# Altium PCB CET-124-120W_pnp.PcbDoc (part 2 of 2)
Units mm, origin at the board's own origin, x right, y up, seen from the top; angles counter-clockwise.
Board outline 250 x 140 mm, 2 copper layers (Top Layer, Bottom Layer); 186 components, 165 nets, 1267 pads, 0 vias.
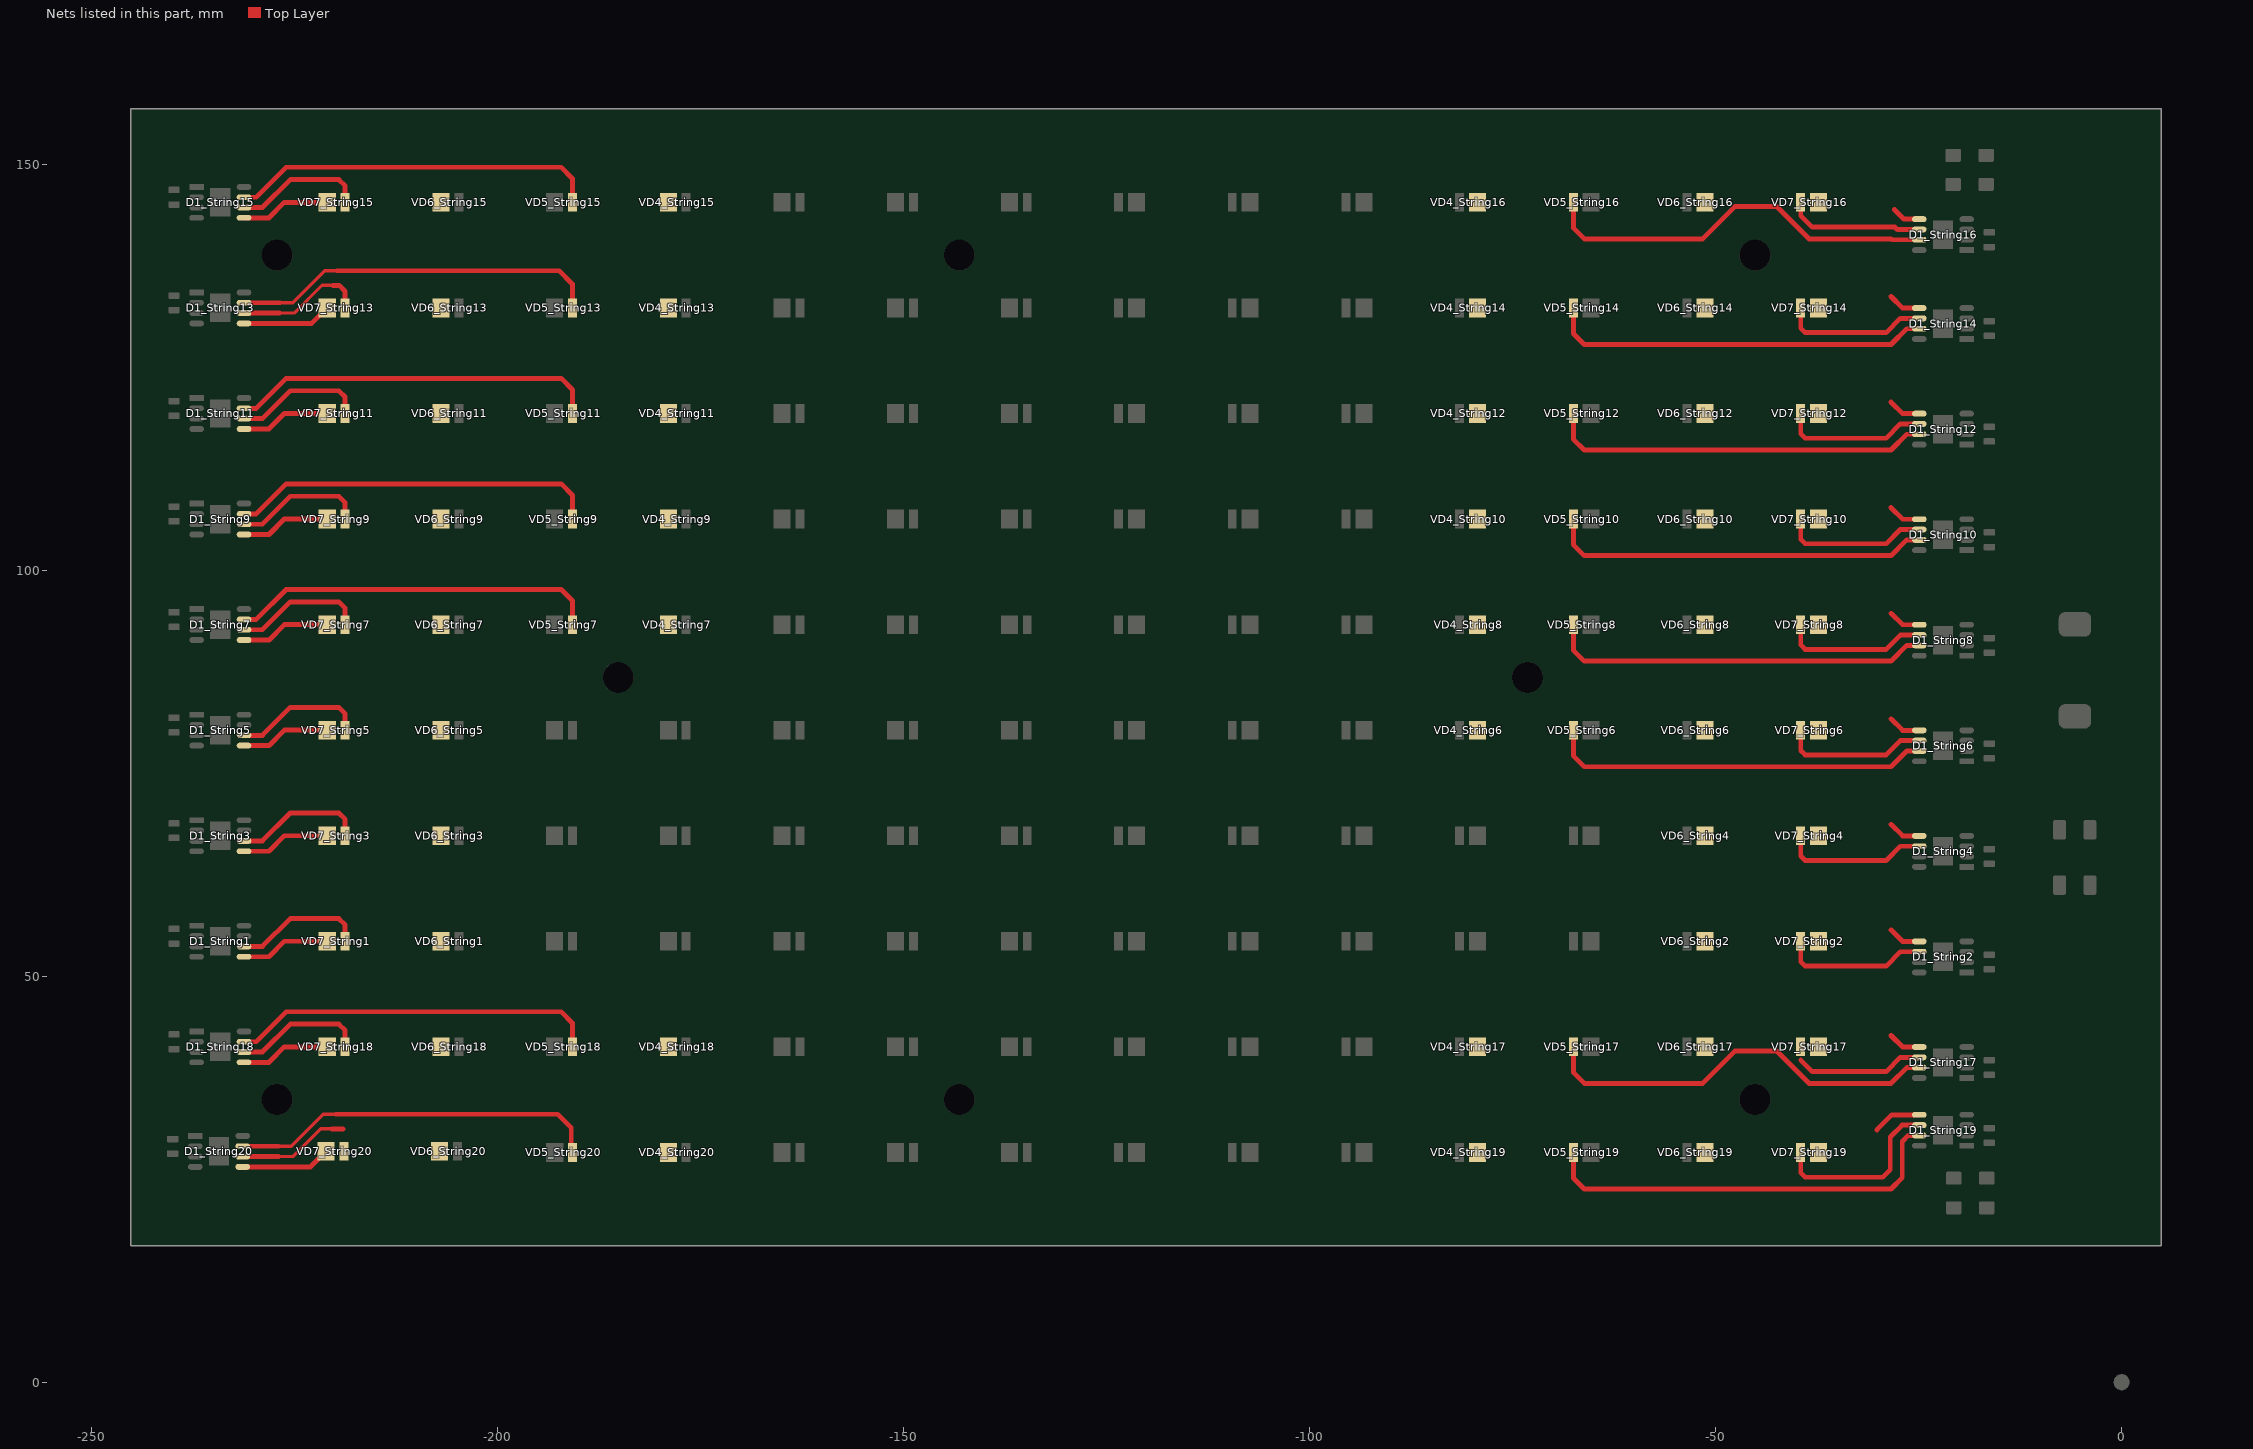
[diagram p2: the nets of this part, all layers, seen from the top]

## Nets (pads, with @x,y where several pads share a name; then routed paths per layer and width w, separated by ;. In a path a pad name is that pad's centre, name@x,y a point inside that pad or via, vN(x,y) a via of type N, cw(c..) or ccw(c..) an arc to the next point about the centre after c; other vN are vias at no path point) (continued)
S2_String6: D1_String6.7 VD4_String6.2 VD5_String6.1 | length 47.1
  Top Layer w0.6: VD5_String6.1@-67.525,80.3 -67.525,77.15 -66.175,75.8 -51.6,75.8 -28.4,75.8 ; -28.4,75.8 -26.46,77.74 D1_String6.7@-24.921,77.74
S2_String7: D1_String7.7 VD4_String7.2 VD5_String7.1 | length 45.5
  Top Layer w0.6: D1_String7.7@-231.229,93.935 -229.74,93.935 -226.05,97.625 -192.175,97.625 -190.775,96.225 VD5_String7.1@-190.775,93.3
S2_String8: D1_String8.7 VD4_String8.2 VD5_String8.1 | length 47.1
  Top Layer w0.6: VD5_String8.1@-67.525,93.3 -67.525,90.15 -66.175,88.8 -28.4,88.8 -26.46,90.74 D1_String8.7@-24.921,90.74
S2_String9: D1_String9.7 VD4_String9.2 VD5_String9.1 | length 45.5
  Top Layer w0.6: D1_String9.7@-231.229,106.935 -229.74,106.935 -226.05,110.625 -192.175,110.625 -190.775,109.225 VD5_String9.1@-190.775,106.3
S2_String10: D1_String10.7 VD4_String10.2 VD5_String10.1 | length 47.1
  Top Layer w0.6: VD5_String10.1@-67.525,106.3 -67.525,103.15 -66.175,101.8 -51.6,101.8 -28.4,101.8 -26.46,103.74 D1_String10.7@-24.921,103.74
S2_String11: D1_String11.7 VD4_String11.2 VD5_String11.1 | length 45.5
  Top Layer w0.6: D1_String11.7@-231.229,119.935 -229.74,119.935 -226.05,123.625 -192.175,123.625 -190.775,122.225 VD5_String11.1@-190.775,119.3
S2_String12: D1_String12.7 VD4_String12.2 VD5_String12.1 | length 47.1
  Top Layer w0.6: VD5_String12.1@-67.525,119.3 -67.525,116.15 -66.175,114.8 -51.6,114.8 -28.4,114.8 -26.46,116.74 D1_String12.7@-24.921,116.74
S2_String13: D1_String13.7 VD4_String13.2 VD5_String13.1 | length 45.7
  Top Layer w0.4: -226.815,132.935 -225.24,132.935 -221.3,136.875 -219.775,136.875
  Top Layer w0.6: D1_String13.7@-231.229,132.935 -226.815,132.935 ; -219.775,136.875 -192.425,136.875 -190.775,135.225 VD5_String13.1@-190.775,132.3
S2_String14: D1_String14.7 VD4_String14.2 VD5_String14.1 | length 47.1
  Top Layer w0.6: VD5_String14.1@-67.525,132.3 -67.525,129.15 -66.175,127.8 -51.6,127.8 -28.4,127.8 -26.46,129.74 D1_String14.7@-24.921,129.74
S2_String15: D1_String15.7 VD4_String15.2 VD5_String15.1 | length 45.5
  Top Layer w0.6: D1_String15.7@-231.229,145.935 -229.74,145.935 -226.05,149.625 -192.175,149.625 -190.775,148.225 VD5_String15.1@-190.775,145.3
S2_String16: D1_String16.7 VD4_String16.2 VD5_String16.1 | length 49.7
  Top Layer w0.6: VD5_String16.1@-67.525,145.3 -67.525,142.15 -66.175,140.8 -51.6,140.8 -47.6,144.8 -42.5,144.8 -38.5,140.8 -28.4,140.8 -28.29,140.69 D1_String16.7@-24.921,140.69
S2_String17: D1_String17.7 VD4_String17.2 VD5_String17.1 | length 50.4
  Top Layer w0.6: VD5_String17.1@-67.525,41.3 -67.525,38.15 -66.175,36.8 -51.6,36.8 -47.6,40.8 -42.5,40.8 -38.5,36.8 -28.4,36.8 -26.46,38.74 D1_String17.7@-24.921,38.74
S2_String18: D1_String18.7 VD4_String18.2 VD5_String18.1 | length 45.5
  Top Layer w0.6: D1_String18.7@-231.229,41.935 -229.74,41.935 -226.05,45.625 -192.175,45.625 -190.775,44.225 VD5_String18.1@-190.775,41.3
S2_String19: D1_String19.7 VD4_String19.2 VD5_String19.1 | length 51.7
  Top Layer w0.6: VD5_String19.1@-67.525,28.3 -67.525,25.15 -66.175,23.8 -28.4,23.8 -27.025,25.175 -27.025,29.65 -26.285,30.39 D1_String19.7@-24.921,30.39
S2_String20: D1_String20.7 VD4_String20.2 VD5_String20.1 | length 45.7
  Top Layer w0.4: -226.975,29.06 -225.4,29.06 -221.46,33 -219.935,33
  Top Layer w0.6: D1_String20.7@-231.389,29.06 -226.975,29.06 ; -219.935,33 -192.585,33 -190.935,31.35 VD5_String20.1@-190.935,28.425
S3_String1: D1_String1.6 VD6_String1.2 VD7_String1.1 | length 16.2
  Top Layer w0.6: D1_String1.6@-231.229,53.665 -228.96,53.665 -225.525,57.1 -219.55,57.1 -218.775,56.325 VD7_String1.1@-218.775,54.3
S3_String2: D1_String2.6 VD6_String2.2 VD7_String2.1 | length 18.1
  Top Layer w0.6: VD7_String2.1@-39.525,54.3 -39.525,51.8 -38.975,51.25 -29,51.25 -27.24,53.01 D1_String2.6@-24.921,53.01
S3_String3: D1_String3.6 VD6_String3.2 VD7_String3.1 | length 16.2
  Top Layer w0.6: D1_String3.6@-231.229,66.665 -228.96,66.665 -225.525,70.1 -219.55,70.1 -218.775,69.325 VD7_String3.1@-218.775,67.3
S3_String4: D1_String4.6 VD6_String4.2 VD7_String4.1 | length 18.1
  Top Layer w0.6: VD7_String4.1@-39.525,67.3 -39.525,64.8 -38.975,64.25 -29,64.25 -27.24,66.01 D1_String4.6@-24.921,66.01
S3_String5: D1_String5.6 VD6_String5.2 VD7_String5.1 | length 16.2
  Top Layer w0.6: D1_String5.6@-231.229,79.665 -228.96,79.665 -225.525,83.1 -219.55,83.1 -218.775,82.325 VD7_String5.1@-218.775,80.3
S3_String6: D1_String6.6 VD6_String6.2 VD7_String6.1 | length 18.1
  Top Layer w0.6: VD7_String6.1@-39.525,80.3 -39.525,77.8 -38.975,77.25 -29,77.25 -27.24,79.01 D1_String6.6@-24.921,79.01
S3_String7: D1_String7.6 VD6_String7.2 VD7_String7.1 | length 16.2
  Top Layer w0.6: D1_String7.6@-231.229,92.665 -228.96,92.665 -225.525,96.1 -219.55,96.1 -218.775,95.325 VD7_String7.1@-218.775,93.3
S3_String8: D1_String8.6 VD6_String8.2 VD7_String8.1 | length 18.1
  Top Layer w0.6: VD7_String8.1@-39.525,93.3 -39.525,90.8 -38.975,90.25 -29,90.25 ; -29,90.25 -27.24,92.01 D1_String8.6@-24.921,92.01
S3_String9: D1_String9.6 VD6_String9.2 VD7_String9.1 | length 16.2
  Top Layer w0.6: D1_String9.6@-231.229,105.665 -228.96,105.665 -225.525,109.1 -219.55,109.1 -218.775,108.325 VD7_String9.1@-218.775,106.3
S3_String10: D1_String10.6 VD6_String10.2 VD7_String10.1 | length 18.1
  Top Layer w0.6: VD7_String10.1@-39.525,106.3 -39.525,103.8 -38.975,103.25 -29,103.25 -27.24,105.01 D1_String10.6@-24.921,105.01
S3_String11: D1_String11.6 VD6_String11.2 VD7_String11.1 | length 16.2
  Top Layer w0.6: D1_String11.6@-231.229,118.665 -228.96,118.665 -225.525,122.1 -219.55,122.1 -218.775,121.325 VD7_String11.1@-218.775,119.3
S3_String12: D1_String12.6 VD6_String12.2 VD7_String12.1 | length 18.1
  Top Layer w0.6: VD7_String12.1@-39.525,119.3 -39.525,116.8 -38.975,116.25 -29,116.25 -27.24,118.01 D1_String12.6@-24.921,118.01
S3_String13: D1_String13.6 VD6_String13.2 VD7_String13.1 | length 16.2
  Top Layer w0.4: -226.835,131.665 -225.06,131.665 -221.625,135.1 -220.275,135.1 -220.25,135.075
  Top Layer w0.6: D1_String13.6@-231.229,131.665 -226.835,131.665 ; -220.25,135.075 -219.525,135.075 -218.775,134.325 VD7_String13.1@-218.775,132.3
S3_String14: D1_String14.6 VD6_String14.2 VD7_String14.1 | length 18.1
  Top Layer w0.6: VD7_String14.1@-39.525,132.3 -39.525,129.8 -38.975,129.25 -29,129.25 -27.24,131.01 D1_String14.6@-24.921,131.01
S3_String15: D1_String15.6 VD6_String15.2 VD7_String15.1 | length 16.2
  Top Layer w0.6: D1_String15.6@-231.229,144.665 -228.96,144.665 -225.525,148.1 -219.55,148.1 -218.775,147.325 VD7_String15.1@-218.775,145.3
S3_String16: D1_String16.6 VD6_String16.2 VD7_String16.1 | length 16.9
  Top Layer w0.6: VD7_String16.1@-39.525,145.3 -39.525,143.675 -38.1,142.25 -27.925,142.25 -27.635,141.96 D1_String16.6@-24.921,141.96
S3_String17: D1_String17.6 VD6_String17.2 VD7_String17.1 | length 15.9
  Top Layer w0.6: -39.525,39.675 -38.1,38.25 -29,38.25 -27.24,40.01 D1_String17.6@-24.921,40.01
S3_String18: D1_String18.6 VD6_String18.2 VD7_String18.1 | length 16.2
  Top Layer w0.6: D1_String18.6@-231.229,40.665 -228.96,40.665 -225.525,44.1 -219.55,44.1 -218.775,43.325 VD7_String18.1@-218.775,41.3
S3_String19: D1_String19.6 VD6_String19.2 VD7_String19.1 | length 22.3
  Top Layer w0.6: VD7_String19.1@-39.525,28.3 -39.525,25.8 -38.975,25.25 -29.425,25.25 -28.5,26.175 -28.5,30.2 -27.04,31.66 D1_String19.6@-24.921,31.66
S3_String20: D1_String20.6 VD6_String20.2 VD7_String20.1 | length 13.8
  Top Layer w0.4: -226.995,27.79 -225.22,27.79 -221.785,31.225 -220.435,31.225 -220.41,31.2
  Top Layer w0.6: D1_String20.6@-231.389,27.79 -226.995,27.79 ; -220.41,31.2 -219,31.2
S4_String1: D1_String1.5 VD7_String1.2 | length 11
  Top Layer w0.6: D1_String1.5@-231.229,52.395 -228.155,52.395 -226.25,54.3 VD7_String1.2@-220.975,54.3
S4_String2: D1_String2.5 VD7_String2.2 | length 4.1
  Top Layer w0.6: -28.4,55.7 -26.98,54.28 D1_String2.5@-24.921,54.28
S4_String3: D1_String3.5 VD7_String3.2 | length 11
  Top Layer w0.6: D1_String3.5@-231.229,65.395 -228.155,65.395 -226.25,67.3 VD7_String3.2@-220.975,67.3
S4_String4: D1_String4.5 VD7_String4.2 | length 4.1
  Top Layer w0.6: -28.4,68.7 -26.98,67.28 D1_String4.5@-24.921,67.28
S4_String5: D1_String5.5 VD7_String5.2 | length 11
  Top Layer w0.6: D1_String5.5@-231.229,78.395 -228.155,78.395 -226.25,80.3 VD7_String5.2@-220.975,80.3
S4_String6: D1_String6.5 VD7_String6.2 | length 4.1
  Top Layer w0.6: -28.4,81.7 -26.98,80.28 D1_String6.5@-24.921,80.28
S4_String7: D1_String7.5 VD7_String7.2 | length 11
  Top Layer w0.6: D1_String7.5@-231.229,91.395 -228.155,91.395 -226.25,93.3 VD7_String7.2@-220.975,93.3
S4_String8: D1_String8.5 VD7_String8.2 | length 4.1
  Top Layer w0.6: -28.4,94.7 -26.98,93.28 D1_String8.5@-24.921,93.28
S4_String9: D1_String9.5 VD7_String9.2 | length 11
  Top Layer w0.6: D1_String9.5@-231.229,104.395 -228.155,104.395 -226.25,106.3 VD7_String9.2@-220.975,106.3
S4_String10: D1_String10.5 VD7_String10.2 | length 4.1
  Top Layer w0.6: -28.4,107.7 -26.98,106.28 D1_String10.5@-24.921,106.28
S4_String11: D1_String11.5 VD7_String11.2 | length 11
  Top Layer w0.6: D1_String11.5@-231.229,117.395 -228.155,117.395 -226.25,119.3 VD7_String11.2@-220.975,119.3
S4_String12: D1_String12.5 VD7_String12.2 | length 4.1
  Top Layer w0.6: -28.4,120.7 -26.98,119.28 D1_String12.5@-24.921,119.28
S4_String13: D1_String13.5 VD7_String13.2 | length 11
  Top Layer w0.6: D1_String13.5@-231.229,130.395 -222.88,130.395 VD7_String13.2@-220.975,132.3
S4_String14: D1_String14.5 VD7_String14.2 | length 4.1
  Top Layer w0.6: -28.4,133.7 -26.98,132.28 D1_String14.5@-24.921,132.28
S4_String15: D1_String15.5 VD7_String15.2 | length 11
  Top Layer w0.6: D1_String15.5@-231.229,143.395 -228.155,143.395 -226.25,145.3 VD7_String15.2@-220.975,145.3
S4_String16: D1_String16.5 VD7_String16.2 | length 3.5
  Top Layer w0.6: -27.975,144.4 -26.805,143.23 D1_String16.5@-24.921,143.23
S4_String17: D1_String17.5 VD7_String17.2 | length 4.1
  Top Layer w0.6: -28.4,42.7 -26.98,41.28 D1_String17.5@-24.921,41.28
S4_String18: D1_String18.5 VD7_String18.2 | length 11
  Top Layer w0.6: D1_String18.5@-231.229,39.395 -228.155,39.395 -226.25,41.3 VD7_String18.2@-220.975,41.3
S4_String19: D1_String19.5 VD7_String19.2 | length 6
  Top Layer w0.6: -30.15,31.075 -28.295,32.93 D1_String19.5@-24.921,32.93
S4_String20: D1_String20.5 VD7_String20.2 | length 11
  Top Layer w0.6: D1_String20.5@-231.389,26.52 -223.04,26.52 VD7_String20.2@-221.135,28.425
pads on no net: D1_String1.2 D1_String1.4 D1_String2.2 D1_String2.4 D1_String3.2 D1_String3.4 D1_String4.2 D1_String4.4 D1_String5.2 D1_String5.4 D1_String6.2 D1_String6.4 D1_String7.2 D1_String7.4 D1_String8.2 D1_String8.4 D1_String9.2 D1_String9.4 D1_String10.2 D1_String10.4 D1_String11.2 D1_String11.4 D1_String12.2 D1_String12.4 D1_String13.2 D1_String13.4 D1_String14.2 D1_String14.4 D1_String15.2 D1_String15.4 D1_String16.2 D1_String16.4 D1_String17.2 D1_String17.4 D1_String18.2 D1_String18.4 D1_String19.2 D1_String19.4 D1_String20.2 D1_String20.4 VD1_String1.0 VD1_String2.0 VD1_String3.0 VD1_String4.0 VD1_String5.0 VD1_String6.0 VD1_String7.0 VD1_String8.0 VD1_String9.0 VD1_String10.0 VD1_String11.0 VD1_String12.0 VD1_String13.0 VD1_String14.0 VD1_String15.0 VD1_String16.0 VD1_String17.0 VD1_String18.0 VD1_String19.0 VD1_String20.0 VD2_String1.0 VD2_String2.0 VD2_String3.0 VD2_String4.0 VD2_String5.0 VD2_String6.0 VD2_String7.0 VD2_String8.0 VD2_String9.0 VD2_String10.0 VD2_String11.0 VD2_String12.0 VD2_String13.0 VD2_String14.0 VD2_String15.0 VD2_String16.0 VD2_String17.0 VD2_String18.0 VD2_String19.0 VD2_String20.0 VD3_String1.0 VD3_String2.0 VD3_String3.0 VD3_String4.0 VD3_String5.0 VD3_String6.0 VD3_String7.0 VD3_String8.0 VD3_String9.0 VD3_String10.0 VD3_String11.0 VD3_String12.0 VD3_String13.0 VD3_String14.0 VD3_String15.0 VD3_String16.0 VD3_String17.0 VD3_String18.0 VD3_String19.0 VD3_String20.0 VD4_String1.0 VD4_String2.0 VD4_String3.0 VD4_String4.0 VD4_String5.0 VD4_String6.0 VD4_String7.0 VD4_String8.0 VD4_String9.0 VD4_String10.0 VD4_String11.0 VD4_String12.0 VD4_String13.0 VD4_String14.0 VD4_String15.0 VD4_String16.0 VD4_String17.0 VD4_String18.0 VD4_String19.0 VD4_String20.0 VD5_String1.0 VD5_String2.0 VD5_String3.0 VD5_String4.0 VD5_String5.0 VD5_String6.0 VD5_String7.0 VD5_String8.0 VD5_String9.0 VD5_String10.0 VD5_String11.0 VD5_String12.0 VD5_String13.0 VD5_String14.0 VD5_String15.0 VD5_String16.0 VD5_String17.0 VD5_String18.0 VD5_String19.0 VD5_String20.0 VD6_String1.0 VD6_String2.0 VD6_String3.0 VD6_String4.0 VD6_String5.0 VD6_String6.0 VD6_String7.0 VD6_String8.0 VD6_String9.0 VD6_String10.0 VD6_String11.0 VD6_String12.0 VD6_String13.0 VD6_String14.0 VD6_String15.0 VD6_String16.0 VD6_String17.0 VD6_String18.0 VD6_String19.0 VD6_String20.0 VD7_String1.0 VD7_String2.0 VD7_String3.0 VD7_String4.0 VD7_String5.0 VD7_String6.0 VD7_String7.0 VD7_String8.0 VD7_String9.0 VD7_String10.0 VD7_String11.0 VD7_String12.0 VD7_String13.0 VD7_String14.0 VD7_String15.0 VD7_String16.0 VD7_String17.0 VD7_String18.0 VD7_String19.0 VD7_String20.0
copper on no net: | length 76.6
  Top Layer w0.5: -251.175,16.8 -241.6,16.8 ; -251.175,156.8 -241.6,156.8 ; -245.15,10.775 -245.15,20.35 ; -245.15,153.25 -245.15,162.825 ; 1.3,16.8 10.875,16.8 ; 1.3,156.8 10.875,156.8 ; 4.85,10.775 4.85,20.35 ; 4.85,153.25 4.85,162.825

## Other copper
Top Layer:
  region: -4.325,133.4 -6.85,133.4 -6.85,100.6 -4.325,100.6
  region net LED+: -20.325,154.275 -22.725,154.275 -22.725,146.7 -20.325,146.7
  region net S4_String16: -38.375,143.9 -37.87,143.395 -27.35,143.395 -27.35,148.45 -27.6,148.7 -37.4,148.7 -38.375,147.725
  region net S3_String16: -39.15,143.675 -39.525,143.675 -39.525,143.475 -39.5,143.45 -39.555,143.395 -39.65,143.395 -42.205,145.95 -48.1,145.95 -50.925,143.125 -52.15,143.125 -52.375,143.35 -52.375,150.05 -51.8,150.625 -39.45,150.625 -39.15,150.325
  region net NetVD5_String16_2: -53.325,142.25 -53.65,141.925 -65.575,141.925 -66.375,142.725 -66.375,150.175 -65.925,150.625 -53.9,150.625 -53.325,150.05
  region net S2_String16: -67.325,142.25 -67.65,141.925 -79.575,141.925 -80.375,142.725 -80.375,150.175 -79.925,150.625 -67.9,150.625 -67.325,150.05
  region net NetVD3_String16_2: -81.325,142.25 -81.65,141.925 -93.575,141.925 -94.375,142.725 -94.375,150.175 -93.925,150.625 -81.9,150.625 -81.325,150.05
  region net S1_String16: -95.325,142.25 -95.65,141.925 -107.575,141.925 -108.375,142.725 -108.375,150.175 -107.925,150.625 -95.9,150.625 -95.325,150.05
  region net NetVD1_String16_2: -109.325,142.25 -109.65,141.925 -121.575,141.925 -122.375,142.725 -122.375,150.175 -121.925,150.625 -109.9,150.625 -109.325,150.05
  region net NetVD1_String14_2: -109.325,129.25 -109.65,128.925 -121.575,128.925 -122.375,129.725 -122.375,137.175 -121.575,137.975 -110.25,137.975 -109.325,137.05
  region net S1_String14: -95.325,129.25 -95.65,128.925 -107.575,128.925 -108.375,129.725 -108.375,137.175 -107.575,137.975 -96.25,137.975 -95.325,137.05
  region net NetVD3_String14_2: -81.325,129.25 -81.65,128.925 -93.575,128.925 -94.375,129.725 -94.375,137.175 -93.575,137.975 -82.25,137.975 -81.325,137.05
  region net S2_String14: -67.325,129.25 -67.65,128.925 -79.575,128.925 -80.375,129.725 -80.375,137.175 -79.575,137.975 -68.25,137.975 -67.325,137.05
  region net NetVD5_String14_2: -53.325,129.25 -53.65,128.925 -65.575,128.925 -66.375,129.725 -66.375,137.175 -65.575,137.975 -54.25,137.975 -53.325,137.05
  region net S4_String14: -38.375,130.9 -37.87,130.395 -30.005,130.395 -27.35,133.05 -27.35,135.45 -27.6,135.7 -37.4,135.7 -38.375,134.725
  region net S3_String14: -39.15,129.425 -51.275,129.425 -52.375,130.525 -52.375,134.9 -50.975,136.3 -49.471,136.3 -48.375,135.575 -46.675,134.45 -43.775,134.45 -42.45,135.175 -41.325,136.3 -40.8,136.3 -39.15,134.65
  region net NetVD1_String13_2: -136.75,126.625 -148.35,126.625 -149.15,127.425 -149.15,135.075 -147.925,136.3 -147.256,136.3 -146.031,135.075 -144.46,134.45 -141.422,134.45 -140.103,135.172 -138.975,136.3 -136.7,136.3 -135.925,135.525 -135.925,127.45
  region net S1_String13: -163.125,135.2 -162.65,135.675 -150.725,135.675 -149.925,134.875 -149.925,127.425 -150.725,126.625 -162.05,126.625 -163.125,127.7
  region net NetVD3_String13_2: -176.975,135.35 -176.65,135.675 -164.725,135.675 -163.925,134.875 -163.925,127.425 -164.725,126.625 -176.05,126.625 -176.975,127.55
  region net S2_String13: -191.15,135.45 -190.925,135.675 -178.725,135.675 -177.925,134.875 -177.925,127.425 -178.725,126.625 -190.05,126.625 -191.15,127.725
  region net NetVD5_String13_2: -205.125,135.2 -204.65,135.675 -192.725,135.675 -191.925,134.875 -191.925,127.425 -192.725,126.625 -204.05,126.625 -205.125,127.7
  region net S3_String13: -219.125,134.95 -218.4,135.675 -206.725,135.675 -205.925,134.875 -205.925,127.425 -206.725,126.625 -218.05,126.625 -219.125,127.7
  region net S3_String15: -219.125,147.95 -218.4,148.675 -206.725,148.675 -205.925,147.875 -205.925,140.425 -206.725,139.625 -218.05,139.625 -219.125,140.7
  region net NetVD5_String15_2: -205.125,148.2 -204.65,148.675 -192.725,148.675 -191.925,147.875 -191.925,140.425 -192.725,139.625 -204.05,139.625 -205.125,140.7
  region net S2_String15: -191.15,148.45 -190.925,148.675 -178.725,148.675 -177.925,147.875 -177.925,140.425 -178.725,139.625 -190.05,139.625 -191.15,140.725
  region net NetVD3_String15_2: -176.975,148.35 -176.65,148.675 -164.725,148.675 -163.925,147.875 -163.925,140.425 -164.725,139.625 -176.05,139.625 -176.975,140.55
  region net S1_String15: -163.125,148.2 -162.65,148.675 -150.725,148.675 -149.925,147.875 -149.925,140.425 -150.725,139.625 -162.05,139.625 -163.125,140.7
  region net NetVD1_String15_2: -136.75,150.975 -148.35,150.975 -149.15,150.175 -149.15,142.525 -147.925,141.3 -147.256,141.3 -146.031,142.525 -144.46,143.15 -141.422,143.15 -140.103,142.428 -138.975,141.3 -136.7,141.3 -135.925,142.075 -135.925,150.15
  region net S4_String15: -219.925,140.6 -220.9,139.625 -222.425,139.625 -222.975,140.175 -222.975,141.15 -224.925,143.1 -228.6,143.1 -228.6,143.35 -224.975,146.975 -220.125,146.975 -219.925,146.775
  region net S4_String13: -219.925,127.662 -220.962,126.625 -229.025,126.625 -229.975,127.575 -229.975,130.325 -229.8,130.5 -225.15,130.5 -221.725,133.925 -220.15,133.925 -219.925,133.7
  region net S4_String11: -219.925,114.662 -220.962,113.625 -229.025,113.625 -229.975,114.575 -229.975,117.325 -229.8,117.5 -228.475,117.5 -225.05,120.925 -220.15,120.925 -219.925,120.7
  region net S3_String11: -219.125,121.95 -218.4,122.675 -206.725,122.675 -205.925,121.875 -205.925,114.425 -206.725,113.625 -218.05,113.625 -219.125,114.7
  region net NetVD5_String11_2: -205.125,122.2 -204.65,122.675 -192.725,122.675 -191.925,121.875 -191.925,114.425 -192.725,113.625 -204.05,113.625 -205.125,114.7
  region net S2_String11: -191.15,122.45 -190.925,122.675 -178.725,122.675 -177.925,121.875 -177.925,114.425 -178.725,113.625 -190.05,113.625 -191.15,114.725
  region net NetVD3_String11_2: -176.975,122.35 -176.65,122.675 -164.725,122.675 -163.925,121.875 -163.925,114.425 -164.725,113.625 -176.05,113.625 -176.975,114.55
  region net S1_String11: -163.125,122.2 -162.65,122.675 -150.725,122.675 -149.925,121.875 -149.925,114.425 -150.725,113.625 -162.05,113.625 -163.125,114.7
  region net S4_String9: -219.925,101.662 -220.962,100.625 -229.025,100.625 -229.975,101.575 -229.975,104.325 -229.8,104.5 -228.45,104.5 -225.025,107.925 -220.15,107.925 -219.925,107.7
  region net S3_String9: -219.125,108.95 -218.4,109.675 -206.725,109.675 -205.925,108.875 -205.925,101.425 -206.725,100.625 -218.05,100.625 -219.125,101.7
  region net NetVD5_String9_2: -205.125,109.2 -204.65,109.675 -192.725,109.675 -191.925,108.875 -191.925,101.425 -192.725,100.625 -204.05,100.625 -205.125,101.7
  region net S2_String9: -191.15,109.45 -190.925,109.675 -178.725,109.675 -177.925,108.875 -177.925,101.425 -178.725,100.625 -190.05,100.625 -191.15,101.725
  region net NetVD3_String9_2: -176.975,109.35 -176.65,109.675 -164.725,109.675 -163.925,108.875 -163.925,101.425 -164.725,100.625 -176.05,100.625 -176.975,101.55
  region net S1_String9: -163.125,109.2 -162.65,109.675 -150.725,109.675 -149.925,108.875 -149.925,101.425 -150.725,100.625 -162.05,100.625 -163.125,101.7
  region net S4_String7: -219.925,88.662 -220.962,87.625 -229.025,87.625 -229.975,88.575 -229.975,91.325 -229.8,91.5 -228.45,91.5 -225.025,94.925 -220.15,94.925 -219.925,94.7
  region net S3_String7: -219.125,95.95 -218.4,96.675 -206.725,96.675 -205.925,95.875 -205.925,88.425 -206.725,87.625 -218.05,87.625 -219.125,88.7
  region net NetVD5_String7_2: -205.125,96.2 -204.65,96.675 -192.725,96.675 -191.925,95.875 -191.925,88.425 -192.725,87.625 -204.05,87.625 -205.125,88.7
  region net NetVD3_String7_2: -176.975,96.35 -176.65,96.675 -164.725,96.675 -163.925,95.875 -163.925,88.425 -164.725,87.625 -176.05,87.625 -176.975,88.55
  region net S1_String7: -163.125,96.2 -162.65,96.675 -150.725,96.675 -149.925,95.875 -149.925,88.425 -150.725,87.625 -162.05,87.625 -163.125,88.7
  region net S4_String5: -219.925,75.662 -220.962,74.625 -229.025,74.625 -229.975,75.575 -229.975,78.325 -229.8,78.5 -228.45,78.5 -225.025,81.925 -220.15,81.925 -219.925,81.7
  region net S3_String5: -219.125,82.95 -218.4,83.675 -206.725,83.675 -205.925,82.875 -205.925,75.425 -206.725,74.625 -218.05,74.625 -219.125,75.7
  region net NetVD5_String5_2: -205.125,83.2 -204.65,83.675 -192.725,83.675 -191.925,82.875 -191.925,75.425 -192.725,74.625 -204.05,74.625 -205.125,75.7
  region net NetVD3_String5_2: -176.975,83.35 -176.65,83.675 -164.725,83.675 -163.925,82.875 -163.925,75.425 -164.725,74.625 -176.05,74.625 -176.975,75.55
  region net S1_String5: -163.125,83.2 -162.65,83.675 -150.725,83.675 -149.925,82.875 -149.925,75.425 -150.725,74.625 -162.05,74.625 -163.125,75.7
  region net S4_String3: -219.925,62.662 -220.962,61.625 -229.025,61.625 -229.975,62.575 -229.975,65.325 -229.8,65.5 -228.45,65.5 -225.025,68.925 -220.15,68.925 -219.925,68.7
  region net S3_String3: -219.125,69.95 -218.4,70.675 -206.725,70.675 -205.925,69.875 -205.925,62.425 -206.725,61.625 -218.05,61.625 -219.125,62.7
  region net NetVD5_String3_2: -205.125,70.2 -204.65,70.675 -192.725,70.675 -191.925,69.875 -191.925,62.425 -192.725,61.625 -204.05,61.625 -205.125,62.7
  region net S2_String3: -191.15,70.45 -190.925,70.675 -178.725,70.675 -177.925,69.875 -177.925,62.425 -178.725,61.625 -190.05,61.625 -191.15,62.725
  region net NetVD3_String3_2: -176.975,70.35 -176.65,70.675 -164.725,70.675 -163.925,69.875 -163.925,62.425 -164.725,61.625 -176.05,61.625 -176.975,62.55
  region net S1_String3: -163.125,70.2 -162.65,70.675 -150.725,70.675 -149.925,69.875 -149.925,62.425 -150.725,61.625 -162.05,61.625 -163.125,62.7
  region net S4_String1: -219.925,49.662 -220.962,48.625 -229.025,48.625 -229.975,49.575 -229.975,52.325 -229.8,52.5 -228.475,52.5 -225.05,55.925 -220.15,55.925 -219.925,55.7
  region net S3_String1: -219.125,56.95 -218.4,57.675 -206.725,57.675 -205.925,56.875 -205.925,49.425 -206.725,48.625 -218.05,48.625 -219.125,49.7
  region net NetVD5_String1_2: -205.125,57.2 -204.65,57.675 -192.725,57.675 -191.925,56.875 -191.925,49.425 -192.725,48.625 -204.05,48.625 -205.125,49.7
  region net S2_String1: -191.15,57.45 -190.925,57.675 -178.725,57.675 -177.925,56.875 -177.925,49.425 -178.725,48.625 -190.05,48.625 -191.15,49.725
  region net NetVD3_String1_2: -176.975,57.35 -176.65,57.675 -164.725,57.675 -163.925,56.875 -163.925,49.425 -164.725,48.625 -176.05,48.625 -176.975,49.55
  region net S1_String1: -163.125,57.2 -162.65,57.675 -150.725,57.675 -149.925,56.875 -149.925,49.425 -150.725,48.625 -162.05,48.625 -163.125,49.7
  region net S3_String18: -219.125,43.95 -218.4,44.675 -206.725,44.675 -205.925,43.875 -205.925,36.425 -206.725,35.625 -218.05,35.625 -219.125,36.7
  region net NetVD5_String18_2: -205.125,44.2 -204.65,44.675 -192.725,44.675 -191.925,43.875 -191.925,36.425 -192.725,35.625 -204.05,35.625 -205.125,36.7
  region net S2_String18: -191.15,44.45 -190.925,44.675 -178.725,44.675 -177.925,43.875 -177.925,36.425 -178.725,35.625 -190.05,35.625 -191.15,36.725
  region net NetVD3_String18_2: -176.975,44.35 -176.65,44.675 -164.725,44.675 -163.925,43.875 -163.925,36.425 -164.725,35.625 -176.05,35.625 -176.975,36.55
  region net S1_String18: -163.125,44.2 -162.65,44.675 -150.725,44.675 -149.925,43.875 -149.925,36.425 -150.725,35.625 -162.05,35.625 -163.125,36.7
  region net S4_String20: -220.085,23.787 -221.122,22.75 -229.185,22.75 -230.135,23.7 -230.135,26.45 -229.96,26.625 -225.31,26.625 -221.885,30.05 -220.31,30.05 -220.085,29.825
  region net S3_String20: -219.285,31.44 -218.925,31.8 -206.885,31.8 -206.085,31 -206.085,23.55 -206.885,22.75 -218.21,22.75 -219.285,23.825
  region net NetVD5_String20_2: -205.285,31.325 -204.81,31.8 -192.885,31.8 -192.085,31 -192.085,23.55 -192.885,22.75 -204.21,22.75 -205.285,23.825
  region net S2_String20: -191.31,31.575 -191.085,31.8 -178.885,31.8 -178.085,31 -178.085,23.55 -178.885,22.75 -190.21,22.75 -191.31,23.85
  region net NetVD3_String20_2: -177.135,31.475 -176.81,31.8 -164.885,31.8 -164.085,31 -164.085,23.55 -164.885,22.75 -176.21,22.75 -177.135,23.675
  region net S1_String20: -163.285,31.325 -162.81,31.8 -150.885,31.8 -150.085,31 -150.085,23.55 -150.885,22.75 -162.21,22.75 -163.285,23.825
  region net S2_String7: -179.075,98.025 -190.05,98.025 -191.15,96.925 -191.15,90.525 -189.925,89.3 -189.256,89.3 -188.031,90.525 -186.46,91.15 -183.422,91.15 -182.103,90.428 -180.975,89.3 -178.7,89.3 -177.925,90.075 -177.925,96.875
  region net S2_String5: -178.75,74.625 -190.35,74.625 -191.15,75.425 -191.15,83.6 -190.725,83.6 -187.875,80.75 -182.125,80.75 -179.55,83.325 -177.925,83.325 -177.925,75.45
  region net S4_String18: -219.925,36.6 -220.9,35.625 -222.425,35.625 -222.975,36.175 -222.975,37.15 -224.925,39.1 -228.6,39.1 -228.6,39.35 -224.975,42.975 -220.125,42.975 -219.925,42.775
  region net NetVD1_String11_2: -149.125,122.2 -148.65,122.675 -136.725,122.675 -135.925,121.875 -135.925,114.425 -136.725,113.625 -148.05,113.625 -149.125,114.7
  region net NetVD1_String9_2: -149.125,109.2 -148.65,109.675 -136.725,109.675 -135.925,108.875 -135.925,101.425 -136.725,100.625 -148.05,100.625 -149.125,101.7
  region net NetVD1_String7_2: -149.125,96.2 -148.65,96.675 -136.725,96.675 -135.925,95.875 -135.925,88.425 -136.725,87.625 -148.05,87.625 -149.125,88.7
  region net NetVD1_String5_2: -149.125,83.2 -148.65,83.675 -136.725,83.675 -135.925,82.875 -135.925,75.425 -136.725,74.625 -148.05,74.625 -149.125,75.7
  region net NetVD1_String3_2: -149.125,70.2 -148.65,70.675 -136.725,70.675 -135.925,69.875 -135.925,62.425 -136.725,61.625 -148.05,61.625 -149.125,62.7
  region net NetVD1_String1_2: -149.125,57.2 -148.65,57.675 -136.725,57.675 -135.925,56.875 -135.925,49.425 -136.725,48.625 -148.05,48.625 -149.125,49.7
  region net NetVD1_String18_2: -136.75,46.975 -148.35,46.975 -149.15,46.175 -149.15,38.525 -147.925,37.3 -147.256,37.3 -146.031,38.525 -144.46,39.15 -141.422,39.15 -140.103,38.428 -138.975,37.3 -136.7,37.3 -135.925,38.075 -135.925,46.15
  region net NetVD1_String20_2: -136.75,22.625 -148.35,22.625 -149.15,23.425 -149.15,31.075 -147.925,32.3 -147.256,32.3 -146.031,31.075 -144.46,30.45 -141.422,30.45 -140.103,31.172 -138.975,32.3 -136.7,32.3 -135.925,31.525 -135.925,23.45
  region net NetVD5_String12_2: -53.325,116.25 -53.65,115.925 -65.575,115.925 -66.375,116.725 -66.375,124.175 -65.575,124.975 -54.25,124.975 -53.325,124.05
  region net S2_String12: -67.325,116.25 -67.65,115.925 -79.575,115.925 -80.375,116.725 -80.375,124.175 -79.575,124.975 -68.25,124.975 -67.325,124.05
  region net NetVD3_String12_2: -81.325,116.25 -81.65,115.925 -93.575,115.925 -94.375,116.725 -94.375,124.175 -93.575,124.975 -82.25,124.975 -81.325,124.05
  region net S1_String12: -95.325,116.25 -95.65,115.925 -107.575,115.925 -108.375,116.725 -108.375,124.175 -107.575,124.975 -96.25,124.975 -95.325,124.05
  region net NetVD1_String12_2: -109.325,116.25 -109.65,115.925 -121.575,115.925 -122.375,116.725 -122.375,124.175 -121.575,124.975 -110.25,124.975 -109.325,124.05
  region net NetVD5_String10_2: -53.325,103.25 -53.65,102.925 -65.575,102.925 -66.375,103.725 -66.375,111.175 -65.575,111.975 -54.25,111.975 -53.325,111.05
  region net S2_String10: -67.325,103.25 -67.65,102.925 -79.575,102.925 -80.375,103.725 -80.375,111.175 -79.575,111.975 -68.25,111.975 -67.325,111.05
  region net NetVD3_String10_2: -81.325,103.25 -81.65,102.925 -93.575,102.925 -94.375,103.725 -94.375,111.175 -93.575,111.975 -82.25,111.975 -81.325,111.05
  region net S1_String10: -95.325,103.25 -95.65,102.925 -107.575,102.925 -108.375,103.725 -108.375,111.175 -107.575,111.975 -96.25,111.975 -95.325,111.05
  region net NetVD1_String10_2: -109.325,103.25 -109.65,102.925 -121.575,102.925 -122.375,103.725 -122.375,111.175 -121.575,111.975 -110.25,111.975 -109.325,111.05
  region net NetVD5_String8_2: -53.325,90.25 -53.65,89.925 -65.575,89.925 -66.375,90.725 -66.375,98.175 -65.575,98.975 -54.25,98.975 -53.325,98.05
  region net NetVD3_String8_2: -81.325,90.25 -81.65,89.925 -93.575,89.925 -94.375,90.725 -94.375,98.175 -93.575,98.975 -82.25,98.975 -81.325,98.05
  region net S1_String8: -95.325,90.25 -95.65,89.925 -107.575,89.925 -108.375,90.725 -108.375,98.175 -107.575,98.975 -96.25,98.975 -95.325,98.05
  region net NetVD1_String8_2: -109.325,90.25 -109.65,89.925 -121.575,89.925 -122.375,90.725 -122.375,98.175 -121.575,98.975 -110.25,98.975 -109.325,98.05
  region net NetVD5_String6_2: -53.325,77.25 -53.65,76.925 -65.575,76.925 -66.375,77.725 -66.375,85.175 -65.575,85.975 -54.25,85.975 -53.325,85.05
  region net NetVD3_String6_2: -81.325,77.25 -81.65,76.925 -93.575,76.925 -94.375,77.725 -94.375,85.175 -93.575,85.975 -82.25,85.975 -81.325,85.05
  region net S1_String6: -95.325,77.25 -95.65,76.925 -107.575,76.925 -108.375,77.725 -108.375,85.175 -107.575,85.975 -96.25,85.975 -95.325,85.05
  region net NetVD1_String6_2: -109.325,77.25 -109.65,76.925 -121.575,76.925 -122.375,77.725 -122.375,85.175 -121.575,85.975 -110.25,85.975 -109.325,85.05
  region net NetVD5_String4_2: -53.325,64.25 -53.65,63.925 -65.575,63.925 -66.375,64.725 -66.375,72.175 -65.575,72.975 -54.25,72.975 -53.325,72.05
  region net S2_String4: -67.325,64.25 -67.65,63.925 -79.575,63.925 -80.375,64.725 -80.375,72.175 -79.575,72.975 -68.25,72.975 -67.325,72.05
  region net NetVD3_String4_2: -81.325,64.25 -81.65,63.925 -93.575,63.925 -94.375,64.725 -94.375,72.175 -93.575,72.975 -82.25,72.975 -81.325,72.05
  region net S1_String4: -95.325,64.25 -95.65,63.925 -107.575,63.925 -108.375,64.725 -108.375,72.175 -107.575,72.975 -96.25,72.975 -95.325,72.05
  region net NetVD1_String4_2: -109.325,64.25 -109.65,63.925 -121.575,63.925 -122.375,64.725 -122.375,72.175 -121.575,72.975 -110.25,72.975 -109.325,72.05
  region net NetVD5_String2_2: -53.325,51.25 -53.65,50.925 -65.575,50.925 -66.375,51.725 -66.375,59.175 -65.575,59.975 -54.25,59.975 -53.325,59.05
  region net S2_String2: -67.325,51.25 -67.65,50.925 -79.575,50.925 -80.375,51.725 -80.375,59.175 -79.575,59.975 -68.25,59.975 -67.325,59.05
  region net NetVD3_String2_2: -81.325,51.25 -81.65,50.925 -93.575,50.925 -94.375,51.725 -94.375,59.175 -93.575,59.975 -82.25,59.975 -81.325,59.05
  region net S1_String2: -95.325,51.25 -95.65,50.925 -107.575,50.925 -108.375,51.725 -108.375,59.175 -107.575,59.975 -96.25,59.975 -95.325,59.05
  region net NetVD1_String2_2: -109.325,51.25 -109.65,50.925 -121.575,50.925 -122.375,51.725 -122.375,59.175 -121.575,59.975 -110.25,59.975 -109.325,59.05
  region net NetVD5_String17_2: -53.325,38.25 -53.65,37.925 -65.575,37.925 -66.375,38.725 -66.375,46.175 -65.575,46.975 -54.25,46.975 -53.325,46.05
  region net S2_String17: -67.325,38.25 -67.65,37.925 -79.575,37.925 -80.375,38.725 -80.375,46.175 -79.575,46.975 -68.25,46.975 -67.325,46.05
  region net NetVD3_String17_2: -81.325,38.25 -81.65,37.925 -93.575,37.925 -94.375,38.725 -94.375,46.175 -93.575,46.975 -82.25,46.975 -81.325,46.05
  region net S1_String17: -95.325,38.25 -95.65,37.925 -107.575,37.925 -108.375,38.725 -108.375,46.175 -107.575,46.975 -96.25,46.975 -95.325,46.05
  region net NetVD1_String17_2: -109.325,38.25 -109.65,37.925 -121.575,37.925 -122.375,38.725 -122.375,46.175 -121.575,46.975 -110.25,46.975 -109.325,46.05
  region net NetVD5_String19_2: -53.325,25.25 -53.65,24.925 -65.575,24.925 -66.375,25.725 -66.375,33.175 -65.575,33.975 -54.25,33.975 -53.325,33.05
  region net S2_String19: -67.325,25.25 -67.65,24.925 -79.575,24.925 -80.375,25.725 -80.375,33.175 -79.575,33.975 -68.25,33.975 -67.325,33.05
  region net NetVD3_String19_2: -81.325,25.25 -81.65,24.925 -93.575,24.925 -94.375,25.725 -94.375,33.175 -93.575,33.975 -82.25,33.975 -81.325,33.05
  region net S1_String19: -95.325,25.25 -95.65,24.925 -107.575,24.925 -108.375,25.725 -108.375,33.175 -107.575,33.975 -96.25,33.975 -95.325,33.05
  region net NetVD1_String19_2: -109.325,25.25 -109.65,24.925 -121.575,24.925 -122.375,25.725 -122.375,33.175 -121.575,33.975 -110.25,33.975 -109.325,33.05
  region net S2_String6: -67.15,77.425 -79.275,77.425 -80.375,78.525 -80.375,82.9 -78.975,84.3 -77.471,84.3 -76.375,83.575 -74.675,82.45 -71.775,82.45 -70.45,83.175 -69.325,84.3 -68.8,84.3 -67.15,82.65
  region net S3_String2: -39.325,51.25 -39.65,50.925 -51.575,50.925 -52.375,51.725 -52.375,59.175 -51.575,59.975 -40.25,59.975 -39.325,59.05
  region net S3_String4: -39.325,64.25 -39.65,63.925 -51.575,63.925 -52.375,64.725 -52.375,72.175 -51.575,72.975 -40.25,72.975 -39.325,72.05
  region net S3_String6: -39.325,77.25 -39.65,76.925 -51.575,76.925 -52.375,77.725 -52.375,85.175 -51.575,85.975 -40.25,85.975 -39.325,85.05
  region net S3_String8: -39.325,90.25 -39.65,89.925 -51.575,89.925 -52.375,90.725 -52.375,98.175 -51.575,98.975 -40.25,98.975 -39.325,98.05
  region net S3_String10: -39.325,103.25 -39.65,102.925 -51.575,102.925 -52.375,103.725 -52.375,111.175 -51.575,111.975 -40.25,111.975 -39.325,111.05
  region net S3_String12: -39.325,116.25 -39.65,115.925 -51.575,115.925 -52.375,116.725 -52.375,124.175 -51.575,124.975 -40.25,124.975 -39.325,124.05
  region net S4_String10: -38.375,104.9 -37.87,104.395 -29.905,104.395 -27.35,106.95 -27.35,109.45 -27.6,109.7 -37.4,109.7 -38.375,108.725
  region net S4_String12: -38.375,117.9 -37.87,117.395 -29.93,117.395 -27.35,119.975 -27.35,122.45 -27.6,122.7 -37.4,122.7 -38.375,121.725
  region net S4_String6: -38.375,78.9 -37.87,78.395 -29.905,78.395 -27.35,80.95 -27.35,83.45 -27.6,83.7 -37.4,83.7 -38.375,82.725
  region net S4_String8: -38.375,91.9 -37.87,91.395 -29.805,91.395 -27.35,93.85 -27.35,96.45 -27.6,96.7 -37.4,96.7 -38.375,95.725
  region net S4_String2: -38.375,52.9 -37.87,52.395 -29.88,52.395 -27.35,54.925 -27.35,57.45 -27.6,57.7 -37.4,57.7 -38.375,56.725
  region net S4_String4: -38.375,65.9 -37.87,65.395 -29.83,65.395 -27.35,67.875 -27.35,70.45 -27.6,70.7 -37.4,70.7 -38.375,69.725
  region net S4_String19: -38.375,26.9 -37.87,26.395 -29.855,26.395 -29.7,26.55 -29.7,31.7 -37.4,31.7 -38.375,30.725
  region net S4_String17: -38.375,39.9 -37.87,39.395 -29.98,39.395 -27.35,42.025 -27.35,44.45 -27.6,44.7 -37.4,44.7 -38.375,43.725
  region net S3_String17: -39.15,39.675 -39.525,39.675 -39.525,39.475 -39.5,39.45 -39.555,39.395 -39.65,39.395 -42.205,41.95 -48.1,41.95 -50.925,39.125 -52.15,39.125 -52.375,39.35 -52.375,46.05 -51.45,46.975 -39.8,46.975 -39.15,46.325
  region net S2_String8: -67.15,91.45 -67.205,91.395 -68.145,91.395 -69.9,93.15 -76.35,93.15 -78.375,91.125 -80.15,91.125 -80.375,91.35 -80.375,98.05 -79.45,98.975 -67.8,98.975 -67.15,98.325
  region net S3_String19: -39.15,25.425 -51.275,25.425 -52.375,26.525 -52.375,30.9 -50.975,32.3 -49.471,32.3 -48.375,31.575 -46.675,30.45 -43.775,30.45 -42.45,31.175 -41.325,32.3 -40.8,32.3 -39.15,30.65
  region net LED+: -135.075,23.925 -134.525,23.375 -124,23.375 -123.325,24.05 -123.325,150.3 -121.675,151.95 -20.875,151.95 -20.875,154.275 -131.725,154.275 -135.075,150.925
  region net GND: -232.975,148.5 -233.225,148.75 -235.125,148.75 -235.35,148.525 -235.35,20.175 -234.175,19 -20.325,19 -20.325,21.35 -20.875,21.35 -20.875,143.875 -23.15,143.875 -23.15,21.1 -231.275,21.1 -233.2,23.025 -233.2,146.05 -232.975,146.275
  region net 220N: -6.925,92.025 -9.95,92.025 -11.625,90.35 -11.625,26.425 -13.7,24.35 -16.25,24.35 -16.25,25.95 -14.625,25.95 -13.625,26.95 -13.625,145.4 -14.925,146.7 -16.45,146.7 -16.45,148.3 -13.25,148.3 -11.65,146.7 -11.65,96.425 -9.925,94.7 -6.925,94.7
  region net NetR2_2: -16.375,20.675 -10.1,20.675 2.125,32.9 2.125,140 -9.7,151.825 -16.25,151.825 -16.25,150.275 -11.3,150.275 0.35,138.625 0.35,62.9 -0.475,62.075 -7.6,62.075 -7.6,60.475 -7.65,60.425 -0.525,60.425 0.325,59.575 0.325,34.625 -12.05,22.25 -16.375,22.25

## Silkscreen, mask and mechanical layers (free items; w line width, h text height)
Top Solder:
  text "+" at -24.95,153.675 h1.6 r270
  text "+" at -128.475,139.55 h1.6 r270
  text "CET-160-140W-LIN V1.0" at -6.375,132.825 h1.6 r270
  text "+" at -128.9,34.75 h1.6 r270
  text "GND" at -22.7,20.675 h1.2 r180
  text "GND" at -227.972,20.625 h1.2 r180
Mechanical 1:
  circle w0.2: c-185.15,86.8 r4
  circle w0.2: c-73.15,86.8 r4
  circle w0.2: c-45.15,34.8 r4
  circle w0.2: c-45.15,138.8 r4
  circle w0.2: c-143.15,34.8 r4
  circle w0.2: c-143.15,138.8 r4
  circle w0.2: c-227.15,34.8 r4
  circle w0.2: c-227.15,138.8 r4
  lines w0.2: -139.26,24.725 -95.275,24.725 ; -26.15,16.8 -26.15,156.8
Mechanical 4:
  the board outline again, w0.2